# Altium PCB PCB1.pcbdoc
Units mil, origin at the board's own origin, x right, y up, seen from the top; angles counter-clockwise.
Board outline 7815 x 2660 mil, 2 copper layers (Top Layer, Bottom Layer); 34 components, 27 nets, 160 pads, 27 vias.
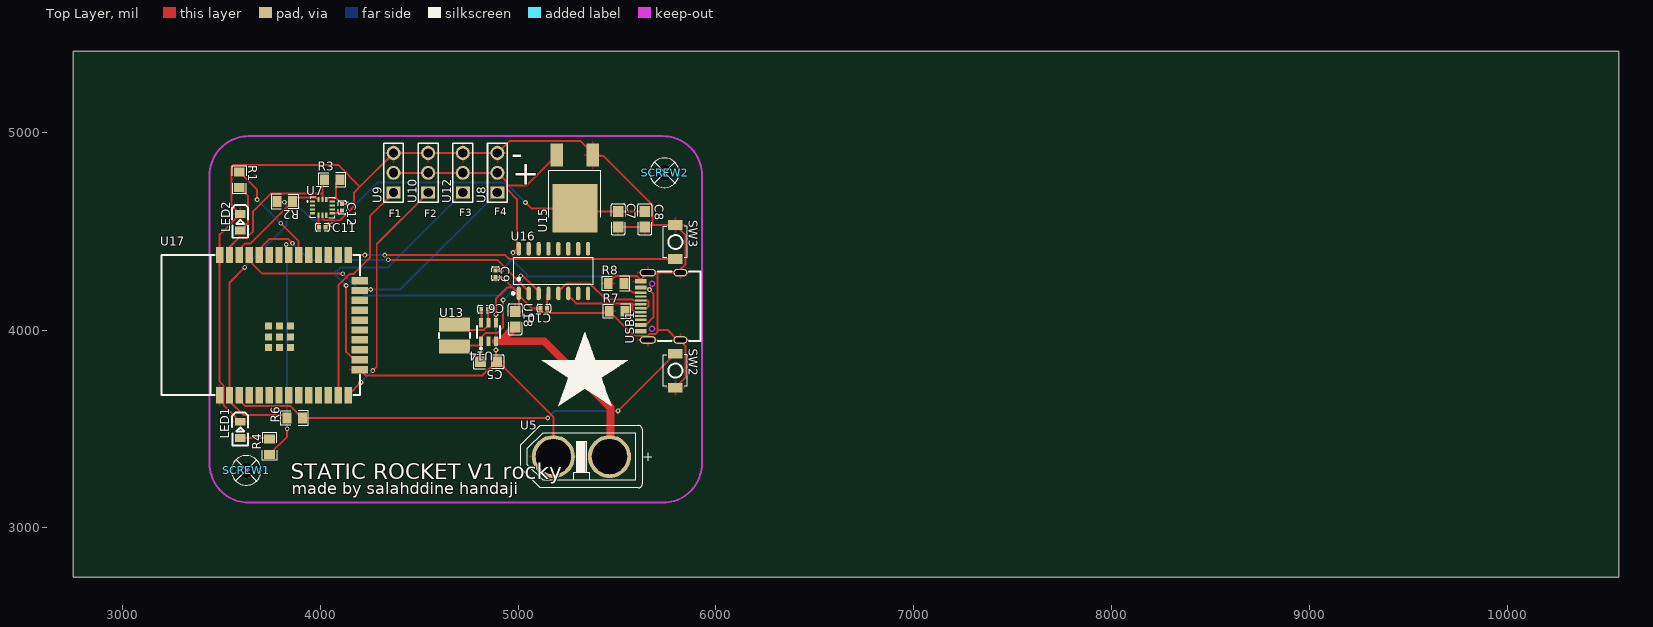
[diagram p0: Top Layer view]
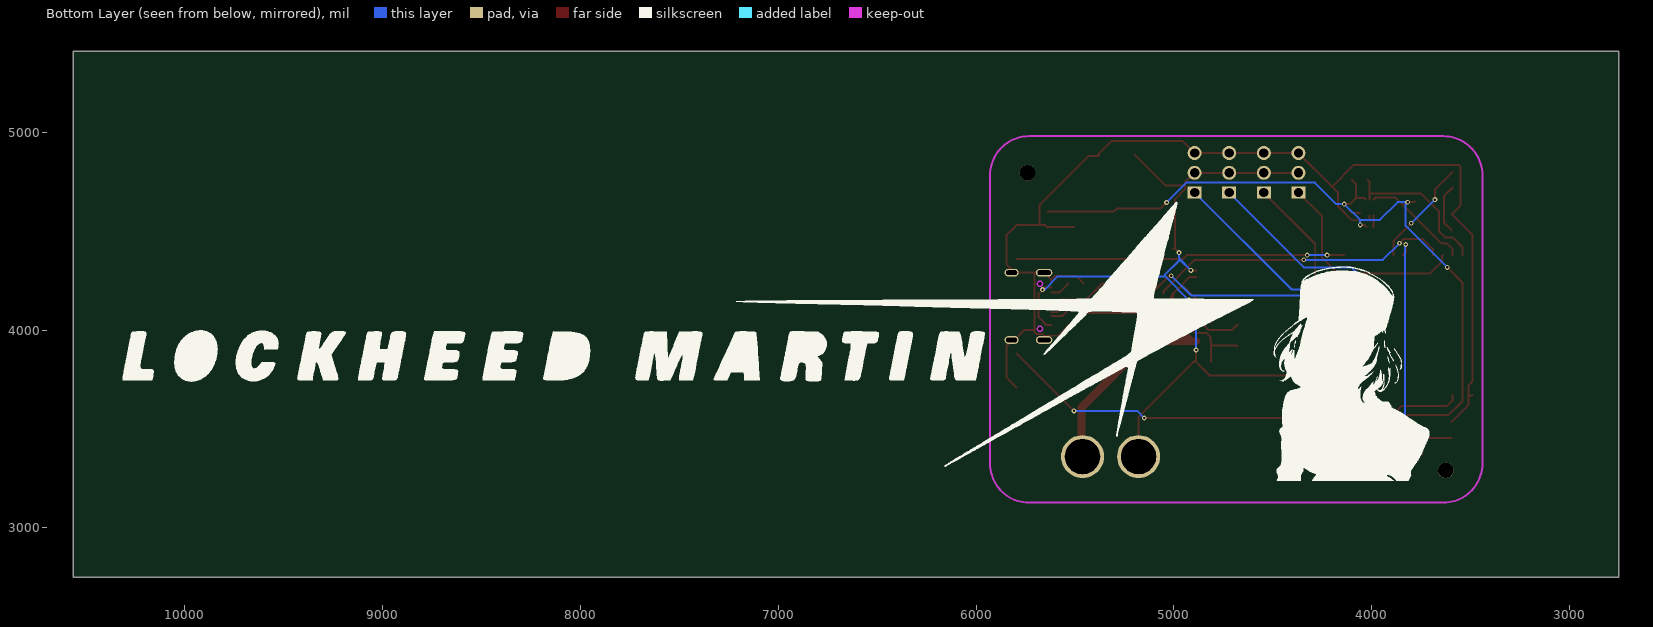
[diagram p1: Bottom Layer view, seen from below]

## Layer stack, top to bottom
Top Layer: signal copper (thickness not stored)
Dielectric: dielectric 12.6, FR-4, Dk 4.8
Bottom Layer: signal copper (thickness not stored)

## Board outline
10565,2750 2750,2750 2750,5410 10565,5410

## Design rules (kind name [scope] priority, off if disabled: settings)
BoardOutlineClearance copperThickness1oz [All] p0: genericclearance=10 ignorepadtopadclearanceinfootprint=FALSE except(0: Arc-SplitContinuation Track-SplitContinuation SMDPad-SplitContinuation THPad-SplitContinuation Via-SplitContinuation Fill-SplitContinuation Poly-SplitContinuation Region-SplitContinuation Text-SplitContinuation; 6: Track-CutoutEdge SMDPad-CutoutEdge THPad-CutoutEdge Via-CutoutEdge Region-CutoutEdge; 11.8: Track-OutlineEdge SMDPad-OutlineEdge THPad-OutlineEdge Via-OutlineEdge Fill-OutlineEdge Region-OutlineEdge Poly-OutlineEdge Text-OutlineEdge Fill-CutoutEdge)
BoardOutlineClearance copperThickness2oz [All] p0: genericclearance=10 ignorepadtopadclearanceinfootprint=FALSE except(0: Arc-SplitContinuation Track-SplitContinuation SMDPad-SplitContinuation THPad-SplitContinuation Via-SplitContinuation Fill-SplitContinuation Poly-SplitContinuation Region-SplitContinuation Text-SplitContinuation; 6: Track-CutoutEdge SMDPad-CutoutEdge THPad-CutoutEdge Via-CutoutEdge Region-CutoutEdge; 11.8: Track-OutlineEdge SMDPad-OutlineEdge THPad-OutlineEdge Via-OutlineEdge Fill-OutlineEdge Region-OutlineEdge Poly-OutlineEdge Text-OutlineEdge Fill-CutoutEdge)
Clearance copperThickness1oz [(InNet('GND') OR InNet('5V') OR InNet('$1N3142') OR InNet('$1N3134') OR InNet('3V') OR InNet('$1N5088') OR InNet('$1N3740') OR InNet('$1N3675') OR InNet('$1N3673') OR InNet('IMU_SDA') OR InNet('IMU_SCL') OR InNet('$1N3736') OR InNet('$1N5353') OR InNet('$1N5239') OR InNet('$1N5305') OR InNet('$1N4616') OR InNet('FIN1') OR InNet('FIN2') OR InNet('FIN3') OR InNet('FIN4') OR InNet('MCU_RX') OR InNet('MCU_TXT') OR InNet('$1N3129') OR InNet('$1N5129') OR InNet('$1N5098') OR InNet('$1N5590') OR InNet('$1N5628'))] p1: gap=7 ignorepadtopadclearanceinfootprint=FALSE except(4: Track-Track; 6: Track-SMDPad SMDPad-SMDPad Track-THPad SMDPad-THPad THPad-THPad Track-Via SMDPad-Via THPad-Via Via-Via SMDPad-Fill THPad-Fill Via-Fill Fill-Fill Track-Region SMDPad-Region THPad-Region Via-Region Region-Region Track-Poly SMDPad-Poly THPad-Poly Via-Poly Fill-Poly Region-Poly Poly-Poly Track-Text SMDPad-Text THPad-Text Via-Text Fill-Text Region-Text Poly-Text Text-Text; 6.9: Track-Hole SMDPad-Hole THPad-Hole Via-Hole Fill-Hole Region-Hole Poly-Hole Text-Hole Sheet-Hole; 11.8: Track-Fill Fill-Region Track-Sheet SMDPad-Sheet THPad-Sheet Via-Sheet Fill-Sheet Region-Sheet Poly-Sheet Text-Sheet)
Clearance copperThickness2oz [All] p1: gap=7 ignorepadtopadclearanceinfootprint=FALSE except(6: Track-SMDPad SMDPad-SMDPad Track-THPad SMDPad-THPad THPad-THPad Track-Via SMDPad-Via THPad-Via Via-Via SMDPad-Fill THPad-Fill Via-Fill Fill-Fill Track-Region SMDPad-Region THPad-Region Via-Region Region-Region Track-Poly SMDPad-Poly THPad-Poly Via-Poly Fill-Poly Region-Poly Poly-Poly Track-Text SMDPad-Text THPad-Text Via-Text Fill-Text Region-Text Poly-Text Text-Text; 6.9: Track-Hole SMDPad-Hole THPad-Hole Via-Hole Fill-Hole Region-Hole Poly-Hole Text-Hole Sheet-Hole; 8: Track-Track; 11.8: Track-Fill Fill-Region Track-Sheet SMDPad-Sheet THPad-Sheet Via-Sheet Fill-Sheet Region-Sheet Poly-Sheet Text-Sheet)
DiffPairsRouting differentialPair [All] p1: maxuncoupledlength=10 minlimit=6 maxlimit=6 mostfreqgap=6 toplayer_minwidth=5 toplayer_prefwidth=10 toplayer_maxwidth=100 bottomlayer_minwidth=5 bottomlayer_prefwidth=10 bottomlayer_maxwidth=100
PasteMaskExpansion pasteMaskExpansion [All] p1: expansion=0
PlaneConnect innerPlane [All] p1: planeconnectstyle=Relief reliefexpansion=20 reliefentries=4 reliefconductorwidth=10 reliefairgap=10
PolygonConnect copperRegion [All] p1: connectstyle=Relief reliefentries=4 reliefconductorwidth=10 polygonreliefangle="90 Angle" airgapwidth=10
RoutingVias viaSize [All] p1: viastyle="Through Hole" holewidth=12.0078 minholewidth=11.811 maxholewidth=248.0314 width=24.0158 minwidth=19.685 maxwidth=393.7008
SolderMaskExpansion solderMaskExpansion [All] p1: useseparateexpansions=TRUE expansion=2 expansionbottom=2
Width copperThickness1oz [All] p1: maxlimit=100 minlimit=5 preferedwidth=10
Width copperThickness2oz [All] p1: maxlimit=100 minlimit=8 preferedwidth=10

## Components (designator, comment, footprint, x,y, rotation, side; value= is the part's Value field where it differs from the comment)
C5 "0805X226M160NT" C0805 4850,3840 r180 top
C6 "C0402X7R160-104MNE" C0402 4830,4105 r180 top
C7 "0805F106M100" C0805 5505,4560 r270 top
C8 "0805F106M100" C0805 5640,4560 r270 top
C9 "C0402X7R160-104MNE" C0402 4885,4285 r270 top
C10 "C0402X7R160-104MNE" C0402 5130,4110 r180 top
C11 "C0402X7R160-104MNE" C0402 4010,4520 r0 top
C12 "C0402X7R160-104MNE" C0402 4110,4620 r270 top
LED1 "17-21SURC/S530-A3/TR8" LED0805-R-RD 3595,3495 r270 top
LED2 "17-21SURC/S530-A3/TR8" LED0805-R-RD 3595,4545 r270 top
R1 "FRC0805J331 TS" R0805 3590,4760 r270 top
R2 "FRC0805J103TS" R0805 3820,4650 r180 top
R3 "FRC0805J103TS" R0805 4060,4760 r0 top
R4 "FRC0805J331 TS" R0805 3742.22,3410.42 r90 top
R6 "FRC0805J103TS" R0805 3870,3555 r0 top
R7 "0805W8F5101T5E" R0805 5500,4095 r0 top
R8 "0805W8F5101T5E" R0805 5495,4235 r0 top
SCREW1 "Screw-Hole-M2" Screw-Hole-M2 3625,3290 r0 top
SCREW2 "Screw-Hole-M2" Screw-Hole-M2 5740,4795 r0 top
SW2 "TS-1088-AR02016" SW-SMD_L3.9-W3.0-P4.45 5795,3795 r270 top
SW3 "TS-1088-AR02016" SW-SMD_L3.9-W3.0-P4.45 5795,4445 r270 top
U5 "XT60-F" CONN-TH_XT60PB-F 5320,3360 r0 top
U7 "ICM-42688-P" LGA-14_L3.0-W2.5-P0.50-TL 4010,4620 r0 top
U8 "CON3-2.54" HDR-TH_3P-P2.54-V-M-1 4895,4795 r90 top
U9 "CON3-2.54" HDR-TH_3P-P2.54-V-M-1 4370,4795 r90 top
U10 "CON3-2.54" HDR-TH_3P-P2.54-V-M-1 4545,4795 r90 top
U12 "CON3-2.54" HDR-TH_3P-P2.54-V-M-1 4720,4795 r90 top
U13 "CY43-2.2UH" IND-SMD_L4.5-W4.0_SLF0403-1 4678.12,3972.61 r270 top
U14 "AP63205WU-7" TSOT-23-6_L2.9-W1.6-P0.95-LS2.8-BL 4850,3990 r0 top
U15 "AMS1117-3.3_C41414107" TO-252-2_L6.6-W5.6-P2.3-LS9.7 5286.59,4749.83 r90 top
U16 "CH340C" SOP-16_L10.0-W3.9-P1.27-LS6.0-BL 5178.23,4297.95 r0 top
U17 "ESP32-WROOM-32E-N8" WIFI-SMD_ESP32-WROOM-32E 3845,4025 r0 top
U18 "HGC0805R5106K350NSLJ" C0805 4984.37,4054.37 r270 top
USB1 "TYPE-C-16PIN_C53207801" USB-C-SMD_TYPE-C16PIN-SHOUHAN 5720,4120 r90 top

## Footprints (in the part's own frame and the unit in brackets; to place one, negate y for a bottom-side part, rotate by r counter-clockwise, add the part's x,y. Pads: shape width x height; smd on the part's side, far side on the other; paste and mask are expansions set on the pad)
C0402 [mm]
  rect 0.5x0.54 smd: 1(-0.42,0) 2(0.42,0)
  silkscreen extent -0.87,-0.5 0.87,0.5
C0805 [mm]
  rect 1.41x1.35 smd: 1(-1,0) 2(1,0)
  silkscreen extent -1.96,-0.9 1.96,0.9
CONN-TH_XT60PB-F [mil]
  round 217.16 hole 177.16 slot 177.36 at 0 deg: +(141.73,0) -(-141.73,0)
  silkscreen extent -307,-157 354,157
HDR-TH_3P-P2.54-V-M-1 [mm]
  rect 1.575x1.8 hole 1.2: 1(-2.54,0)
  round 1.8 hole 1.2: 2(0,0) 3(2.54,0)
  silkscreen extent -3.81,-1.27 3.81,1.27
IND-SMD_L4.5-W4.0_SLF0403-1 [mm]
  rect 1.8x4 smd: 1(-1.4,0) 2(1.4,0)
  silkscreen extent -0.3,-2 0.3,2
LED0805-R-RD [mm]
  rect 1x1.4 smd: 1(1.05,0) 2(-1.05,0)
  silkscreen extent -2.22,-1.04 1.99,1.01
LGA-14_L3.0-W2.5-P0.50-TL [mm]
  rect 0.675x0.28 smd: 1(-1.262,0.75) 2(-1.262,0.25) 3(-1.262,-0.25) 4(-1.262,-0.75) 8(1.262,-0.75) 9(1.262,-0.25) 10(1.262,0.25) 11(1.262,0.75)
  rect 0.28x0.675 smd: 5(-0.5,-1.012) 6(0,-1.012) 7(0.5,-1.012) 12(0.5,1.012) 13(0,1.012) 14(-0.5,1.012)
  silkscreen extent -1.98,-1.33 1.58,1.33
R0805 [mm]
  rect 1.133x1.377 smd: 1(-1,0) 2(1,0)
  silkscreen extent -1.76,-0.92 1.76,0.92
Screw-Hole-M2 [mm]
  round 2 hole 2: 1(0,0)
  silkscreen extent -1.9,-1.9 1.9,1.9
SOP-16_L10.0-W3.9-P1.27-LS6.0-BL [mm]
  oval 0.56x1.745 smd: 1(-4.445,-2.872) 2(-3.175,-2.872) 3(-1.905,-2.872) 4(-0.635,-2.872) 5(0.635,-2.872) 6(1.905,-2.872) 7(3.175,-2.872) 8(4.445,-2.872) 9(4.445,2.872) 10(3.175,2.872) 11(1.905,2.872) 12(0.635,2.872) 13(-0.635,2.872) 14(-1.905,2.872) 15(-3.175,2.872) 16(-4.445,2.872)
  silkscreen extent -5.33,-3.02 5.08,1.77
SW-SMD_L3.9-W3.0-P4.45 [mm]
  rect 1.23x1.86 smd: 1(-2.185,0) 2(2.185,0)
  silkscreen extent -2.03,-1.54 2.03,1.54
TO-252-2_L6.6-W5.6-P2.3-LS9.7 [mm]
  rect 3x1.6 smd: 1(3.423,-2.3) 3(3.424,2.3)
  rect 6.2x5.8 smd: 2(-3.424,0)
  silkscreen extent -4.58,-3.34 1.38,3.35
TSOT-23-6_L2.9-W1.6-P0.95-LS2.8-BL [mm]
  rect 0.55x1.2 smd: 1(-0.95,-1.2) 2(0,-1.2) 3(0.95,-1.2) 4(0.95,1.2) 5(0,1.2) 6(-0.95,1.2)
  silkscreen extent -1.5,-2.25 1.5,0.8
USB-C-SMD_TYPE-C16PIN-SHOUHAN [mm]
  oval 1x2.1 hole 0.6 slot 1.7 at 90 deg: 1(-4.32,1.63) 2(4.32,1.63)
  oval 1x1.8 hole 0.6 slot 1.4 at 90 deg: 3(-4.32,-2.55) 4(4.32,-2.55)
  rect 0.55x1.45 smd: A1B12(-3.2,2.55) A4B9(-2.4,2.55) B1A12(3.2,2.55) B4A9(2.4,2.55)
  rect 0.3x1.45 smd: A5(-1.25,2.55) A6(-0.25,2.55) A7(0.25,2.55) A8(1.25,2.55) B5(1.75,2.55) B6(0.75,2.55) B7(-0.75,2.55) B8(-1.75,2.55)
  Board Outline Layer circle w0.005: c-2.89,1.1 r0.325
  Board Outline Layer circle w0.005: c2.89,1.1 r0.325
  Board Outline Layer region: -2.89,0.775 -3.031,0.807 -3.144,0.897 -3.207,1.027 -3.207,1.172 -3.144,1.302 -3.031,1.393 -2.89,1.425 -2.89,1.425 -2.749,1.393 -2.636,1.302 -2.573,1.172 -2.573,1.027 -2.636,0.897 -2.749,0.807 -2.89,0.775
  Board Outline Layer region: 2.89,0.775 2.749,0.807 2.636,0.897 2.573,1.027 2.573,1.172 2.636,1.302 2.749,1.393 2.89,1.425 2.89,1.425 3.031,1.393 3.144,1.302 3.207,1.172 3.207,1.027 3.144,0.897 3.031,0.807 2.89,0.775
  Multi-Layer board cut-out: -2.89,0.775 -3.031,0.807 -3.144,0.897 -3.207,1.027 -3.207,1.172 -3.144,1.302 -3.031,1.393 -2.89,1.425 -2.89,1.425 -2.749,1.393 -2.636,1.302 -2.573,1.172 -2.573,1.027 -2.636,0.897 -2.749,0.807 -2.89,0.775
  Multi-Layer board cut-out: 2.89,0.775 2.749,0.807 2.636,0.897 2.573,1.027 2.573,1.172 2.636,1.302 2.749,1.393 2.89,1.425 2.89,1.425 3.031,1.393 3.144,1.302 3.207,1.172 3.207,1.027 3.144,0.897 3.031,0.807 2.89,0.775
  silkscreen extent -4.45,-5.15 4.45,0.36
WIFI-SMD_ESP32-WROOM-32E [mm]
  rect 0.95x2.1 smd: 1(-9.003,-9) 2(-7.733,-9) 3(-6.463,-9) 4(-5.193,-9) 5(-3.923,-9) 6(-2.653,-9) 7(-1.383,-9) 8(-0.113,-9) 9(1.157,-9) 10(2.427,-9) 11(3.697,-9) 12(4.967,-9) 13(6.237,-9) 14(7.507,-9) 25(7.507,9) 26(6.237,9) 27(4.967,9) 28(3.697,9) 29(2.427,9) 30(1.157,9) 31(-0.113,9) 32(-1.383,9) 33(-2.653,9) 34(-3.923,9) 35(-5.193,9) 36(-6.463,9) 37(-7.733,9) 38(-9.003,9)
  rect 2.1x0.95 smd: 15(9.003,-5.715) 16(9.003,-4.445) 17(9.003,-3.175) 18(9.003,-1.905) 19(9.003,-0.635) 20(9.003,0.635) 21(9.003,1.905) 22(9.003,3.175) 23(9.003,4.445) 24(9.003,5.715)
  rect 0.9x0.9 smd: 39(-2.722,-2.9) 39(-2.722,-1.5) 39(-2.722,-0.1) 39(-1.322,-2.9) 39(-1.322,-1.5) 39(-1.322,-0.1) 39(0.078,-2.9) 39(0.078,-1.5) 39(0.078,-0.1)
  silkscreen extent -16.48,-9 9.02,9.02

## Via types
v1: diameter 24.02, hole 12.01, Top Layer to Bottom Layer, 27 vias

## Nets (pads, with @x,y where several pads share a name; then routed paths per layer and width w, separated by ;. In a path a pad name is that pad's centre, name@x,y a point inside that pad or via, vN(x,y) a via of type N, cw(c..) or ccw(c..) an arc to the next point about the centre after c; other vN are vias at no path point)
3V: C7.1 C8.1 C11.2 C12.1 R2.2 R3.2 R6.1 U7.12 U15.2 U17.2 | length 3777.6
  Top Layer w10: v1(3618.11,4316.54) 3540.57,4239 U17.2 3540.57,3640.66 3610.57,3570.66 3814.97,3570.66 R6.1 ; R2.2 3784.09,4646.54 v1(3818.11,4646.54) ; C11.2 4038.11,4531.57 v1(4058.11,4531.57) ; U7.12 4036.36,4666.54 4080,4666.54 ; R3.2 4080,4740.63 4080,4666.54 ; v1(4138.11,4636.54) C12.1 4080,4666.54 ; v1(5036.59,4645.02) 5066.59,4615.02 U15.2 5302.24,4599.37 C7.1 C8.1
  Bottom Layer w10: v1(3618.11,4316.54) 3828.11,4526.54 3828.11,4636.54 v1(3818.11,4646.54) 3868.11,4646.54 3958.11,4556.54 4058.11,4556.54 ; v1(4058.11,4531.57) 4058.11,4556.54 ; v1(5036.59,4645.02) 4936.59,4745.02 4286.59,4745.02 4178.11,4636.54 v1(4138.11,4636.54) 4058.11,4556.54
5V: C5.2 C9.1 U8.2 U9.2 U10.2 U12.2 U13.2 U14.1 U15.3 U16.16 USB1.A4B9 USB1.B4A9 | length 3189.9
  Top Layer w10: U9.2 U10.2 U12.2 U8.2 4943.73,4746.27 4943.73,4731.54 ; U13.2 4683.38,3922.76 U14.1@4812.6,3922.76 ; C5.2 4812.6,3841.97 U14.1@4812.6,3922.76 ; C9.1 v1(4913.73,4301.54) ; v1(4923.73,4151.54) 4923.73,4013.89 4893.73,3983.89 4833.73,3983.89 4813.73,3963.89 4813.73,3943.89 U14.1 U14.1@4812.6,3922.76 ; v1(4973.73,4391.54) U16.16@4993.73,4411.54 ; U16.16 U16.16@4993.73,4411.54 ; U15.3 5042.95,4731.54 4943.73,4731.54 ; USB1.A4B9 5644.75,4025.51 5683.73,4064.49 5683.73,4184.49 v1(5663.73,4204.49) 5653.73,4214.49 USB1.B4A9 ; 4943.73,4731.54 4943.73,4711.54 4993.73,4661.54 U16.16@4993.73,4411.54
  Bottom Layer w10: v1(4913.73,4301.54) 4963.73,4351.54 ; v1(4923.73,4151.54) 5043.73,4271.54 ; v1(4973.73,4391.54) 4973.73,4361.54 4963.73,4351.54 ; v1(5663.73,4204.49) 5653.73,4204.49 5586.68,4271.54 5043.73,4271.54 ; 4963.73,4351.54 4973.73,4351.54 5043.73,4281.54 5043.73,4271.54
$1N3129: U5.+ U14.3 U18.2 | length 1070.4
  Top Layer w39.37: U14.3 4912.13,3942.76 ; U18.2 4912.13,3942.76 ; U5.+ 5466.73,3365 5466.73,3608.27 5132.24,3942.76 4912.13,3942.76
$1N3134: C6.1 U13.1 U14.5 | length 277.1
  Top Layer w10: U13.1 4705.14,4000.7 4826.54,4000.7 4846.54,4020.7 U14.5@4846.54,4040.7 ; C6.1 U14.5@4846.54,4040.7 ; U14.5 U14.5@4846.54,4040.7
$1N3142: C6.2 U14.6 | length 68.1
  Top Layer w10: U14.6 4813.46,4038.1 C6.2
$1N3673: R1.1 U17.30 | length 544.5
  Top Layer w10: R1.1 3680,4709.37 v1(3680,4659.37) ; v1(3800,4539.37) 3890.57,4448.8 U17.30
  Bottom Layer w10: v1(3680,4659.37) v1(3800,4539.37)
$1N3675: LED2.1 R1.2 | length 252.2
  Top Layer w10: R1.2 3635,4675.63 3635,4543.65 LED2.1
$1N3736: R4.1 U17.31 | length 1159.9
  Top Layer w10: R4.1 3832.22,3461.05 v1(3832.22,3501.05) ; v1(3827.2,4432.7) 3827.2,4392.7 U17.31
  Bottom Layer w10: v1(3827.2,4432.7) 3832.22,4427.68 v1(3832.22,3501.05)
$1N3740: LED1.1 R4.2 | length 148.8
  Top Layer w10: LED1.1 3738.36,3453.65 R4.2
$1N4616: SW3.2 U17.25 | length 1662.9
  Top Layer w10: U17.25 4140.93,4378.98 v1(4225,4378.98) ; v1(4325,4378.98) 4935,4378.98 4955,4358.98 SW3.2
  Bottom Layer w10: v1(4225,4378.98) v1(4325,4378.98)
$1N5088: C10.1 U16.4 | length 77.6
  Top Layer w10: C10.1 5146.54,4178.17 U16.4
$1N5098: U16.6 USB1.A7 USB1.B7 | length 470.8
  Top Layer w10: U16.6 5253.23,4174.86 5293.23,4134.86 5573.23,4134.86 5578.26,4129.84 ; USB1.B7 5618.97,4089.84 5588.26,4089.84 5578.26,4099.84 5578.26,4129.84 ; USB1.A7 5578.26,4129.84
$1N5129: U16.5 USB1.A6 USB1.B6 | length 589.3
  Top Layer w10: U16.5 5203.23,4194.86 5243.23,4234.86 5363.23,4234.86 5443.23,4154.86 5577.9,4154.86 5583.23,4149.53 USB1.B6 5653.83,4149.53 5659.6,4143.76 5659.6,4119.53 5649.6,4109.53 5620.23,4109.53 USB1.A6
$1N5239: R7.2 USB1.A5 | length 90.3
  Top Layer w10: R7.2 5563.58,4070.79 USB1.A5
$1N5305: R8.2 USB1.B5 | length 104.3
  Top Layer w10: R8.2 5580.47,4188.9 USB1.B5
$1N5353: R6.2 SW2.1 U17.3 | length 2403.1
  Top Layer w10: U17.3 3590.57,3643.8 3619.37,3615 3849.37,3615 R6.2 v1(5148.98,3555) ; v1(5505,3591.02) SW2.1
  Bottom Layer w10: v1(5148.98,3555) 5185,3591.02 v1(5505,3591.02)
$1N5590: C11.1 U7.5 | length 61.4
  Top Layer w10: U7.5 3990.32,4523.15 C11.1
$1N5628: C12.2 U7.8 | length 55.7
  Top Layer w10: U7.8 4097.01,4590.47 C12.2
FIN1: U9.1 U17.13 | length 1151.8
  Top Layer w10: U17.13 4090.57,4225.57 4149.29,4284.29 4169.29,4284.29 4250,4365 4250,4575 U9.1
FIN2: U10.1 U17.14 | length 1191.8
  Top Layer w10: U17.14 v1@4204.9,3735 ; v1(4265,3795) 4285,3815 4285,4435 U10.1
  Bottom Layer w10: v1(4205,3735) v1(4265,3795)
FIN3: U12.1 U17.16 | length 1317.7
  Top Layer w10: v1(4130,4225) 4130,3889.43 4160,3859.43 4190,3859.43 U17.16
  Bottom Layer w10: v1(4130,4225) 4080,4275 4080,4295 4100,4315 4340,4315 U12.1
FIN4: U8.1 U17.23 | length 900.6
  Top Layer w10: U17.23 4204.43,4205 v1(4255,4205)
  Bottom Layer w10: v1(4255,4205) 4405,4205 U8.1
GND: C5.1 C7.2 C8.2 C9.2 C10.2 LED1.2 LED2.2 R7.1 R8.1 SW2.2 SW3.1 U5.- U7.6 U8.3 U9.3 U10.3 U12.3 U14.4 U15.1 U16.1 U17.1 U17.15 U17.38 U18.1 USB1.1 USB1.2 USB1.3 USB1.4 USB1.B1A12 | length 8854.6
  Top Layer w10: U17.1 3491.9,3669.34 3510.57,3669.34 ; LED1.2 3510.57,3620.78 3510.57,3669.34 ; U7.6 4009.99,4565.01 4020,4555 4100,4555 4170,4625 4170,4695 4200,4725 ; U17.15 4229.44,3770 4819.37,3770 C5.1 ; C9.2 4919.64,4268.46 4973.23,4214.86 ; v1(4887.4,3899.03) 4887.4,3841.97 C5.1 ; U14.4 v1(4887.4,4079.03) 4887.4,4159.03 4943.23,4214.86 4973.23,4214.86 ; U18.1 5003.23,4112.6 U16.1 ; U5.- 5178.27,3561.1 4899.37,3840 C5.1 ; U15.1 5381.1,4880.63 U15.1@5390,4880.63 ; R8.1 5494.49,4273.86 5599.6,4273.86 USB1.B1A12@5619.6,4253.86 ; C7.2 C8.2 5650,4530.63 5670,4530.63 ; USB1.B1A12 USB1.B1A12@5619.6,4253.86 ; USB1.1 5655,3950.74 5655,3971.02 ; SW2.2 5845,3758.98 5845,3921.02 USB1.3@5815,3951.02 ; USB1.3 5819.31,3951.02 USB1.3@5815,3951.02 ; USB1.4 5815,4295.47 USB1.4@5815,4301.02 ; 3510.57,3669.34 3510.57,3719.34 3490.57,3739.34 U17.38 3490.57,4481.92 LED2.2 3550,4631.35 3550,4825 3560,4835 4090,4835 4200,4725 ; 4200,4725 U9.3 U10.3 U12.3 U8.3 4955,4955 5315.63,4955 U15.1@5390,4880.63 ; 4973.23,4214.86 U16.1 ; U16.1 5008.1,4180 5008.1,4170 5068.1,4110 C10.2 5113.46,4102.17 5130.63,4085 5450.63,4085 R7.1 5584.61,3971.02 5655,3971.02 ; U15.1@5390,4880.63 5430,4880.63 5680,4630.63 5680,4540.63 5670,4530.63 ; USB1.B1A12@5619.6,4253.86 USB1.2 5656.77,4291.02 5705,4291.02 ; 5655,3971.02 5665,3981.02 5695,3981.02 5705,3991.02 5705,4001.02 ; 5670,4530.63 5794.61,4530.63 SW3.1 5845,4481.02 5845,4331.02 USB1.4@5815,4301.02 ; 5705,4001.02 5755,4001.02 5805,3951.02 USB1.3@5815,3951.02 ; 5705,4001.02 5705,4291.02 ; 5705,4291.02 5805,4291.02 USB1.4@5815,4301.02
  Bottom Layer w10: v1(4887.4,3899.03) v1(4887.4,4079.03)
IMU_SCL: R3.1 U7.13 U17.37 | length 784.6
  Top Layer w10: U17.37 3540.57,4419.34 3589.99,4468.76 3628.89,4468.76 3659.99,4499.86 3659.99,4599.86 3749.99,4689.86 4009.99,4689.86 ; U7.13 4009.99,4689.86 ; R3.1 4009.99,4749.36 4009.99,4689.86
IMU_SDA: R2.1 U7.14 U17.36 | length 541.8
  Top Layer w10: U17.36 3590.57,4409.34 3619.37,4438.14 3647.51,4438.14 R2.1 3879.23,4669.86 3980.32,4669.86 U7.14
MCU_RX: U16.2 U17.34 | length 1532.9
  Top Layer w10: U17.34 3690.57,4409.34 3740.57,4459.34 3838.76,4459.34 v1(3858.76,4439.34) ; v1(4343.23,4354.86) 4893.23,4354.86 5053.23,4194.86 U16.2
  Bottom Layer w10: v1(3858.76,4439.34) 3943.23,4354.86 v1(4343.23,4354.86)
MCU_TXT: U16.3 U17.35 | length 1649.5
  Top Layer w10: U17.35 3645.04,4374.86 3645.04,4344.86 3705.04,4284.86 v1(4113.23,4284.86) ; v1(5013.23,4274.86) 5023.23,4274.86 5103.23,4194.86 U16.3
  Bottom Layer w10: v1(4113.23,4284.86) 4223.23,4174.86 4913.23,4174.86 v1(5013.23,4274.86)
pads on no net: SCREW1.1 SCREW2.1 U7.1 U7.2 U7.3 U7.4 U7.7 U7.9 U7.10 U7.11 U14.2 U16.7 U16.8 U16.9 U16.10 U16.11 U16.12 U16.13 U16.14 U16.15 U17.4 U17.5 U17.6 U17.7 U17.8 U17.9 U17.10 U17.11 U17.12 U17.17 U17.18 U17.19 U17.20 U17.21 U17.22 U17.24 U17.26 U17.27 U17.28 U17.29 U17.32 U17.33 U17.39 USB1.A1B12 USB1.A8 USB1.B8

## Polygon pours and split planes (outlines as drawn)
GND on Top Layer (solid, remove dead copper, pour order 0): 3000,5160 6105,5160 6105,3000 3000,3000

## Keep-outs
Board Outline Layer:
  lines w10: 3440,3324.29 ccw(c3636.85,3324.29) 3636.85,3127.44 5732.2,3127.44 ccw(c5732.2,3324.29) 5929.06,3324.29 5929.06,4783.15 ccw(c5732.2,4783.15) 5732.2,4980 3636.85,4980 ccw(c3636.85,4783.15) 3440,4783.15 3440,3324.29

## Silkscreen, mask and mechanical layers (free items; w line width, h text height)
Top Silkscreen Layer:
  region: 99 vertices and 6 holes, not listed, extent 5120,3615 5555,3990
  text "-" at 4965,4835 h120
  text "+" at 4970,4735 h120
  text "F4" at 4878.42,4580.31 h39.37
  text "F3" at 4702.85,4575.66 h39.37
  text "F2" at 4523.99,4571.06 h39.37
  text "F1" at 4345,4570 h39.37
  text "F1" at 4345,4570 h39.37
  text "STATIC ROCKET V1 rocky" at 3850,3245 h78.74
  text "made by salahddine handaji" at 3855,3170 h59.06
Bottom Silkscreen Layer:
  drawing of 30 lines, arcs and shapes, not listed